# EAGLE board LEDCubeArray (EAGLE 7.2.0)
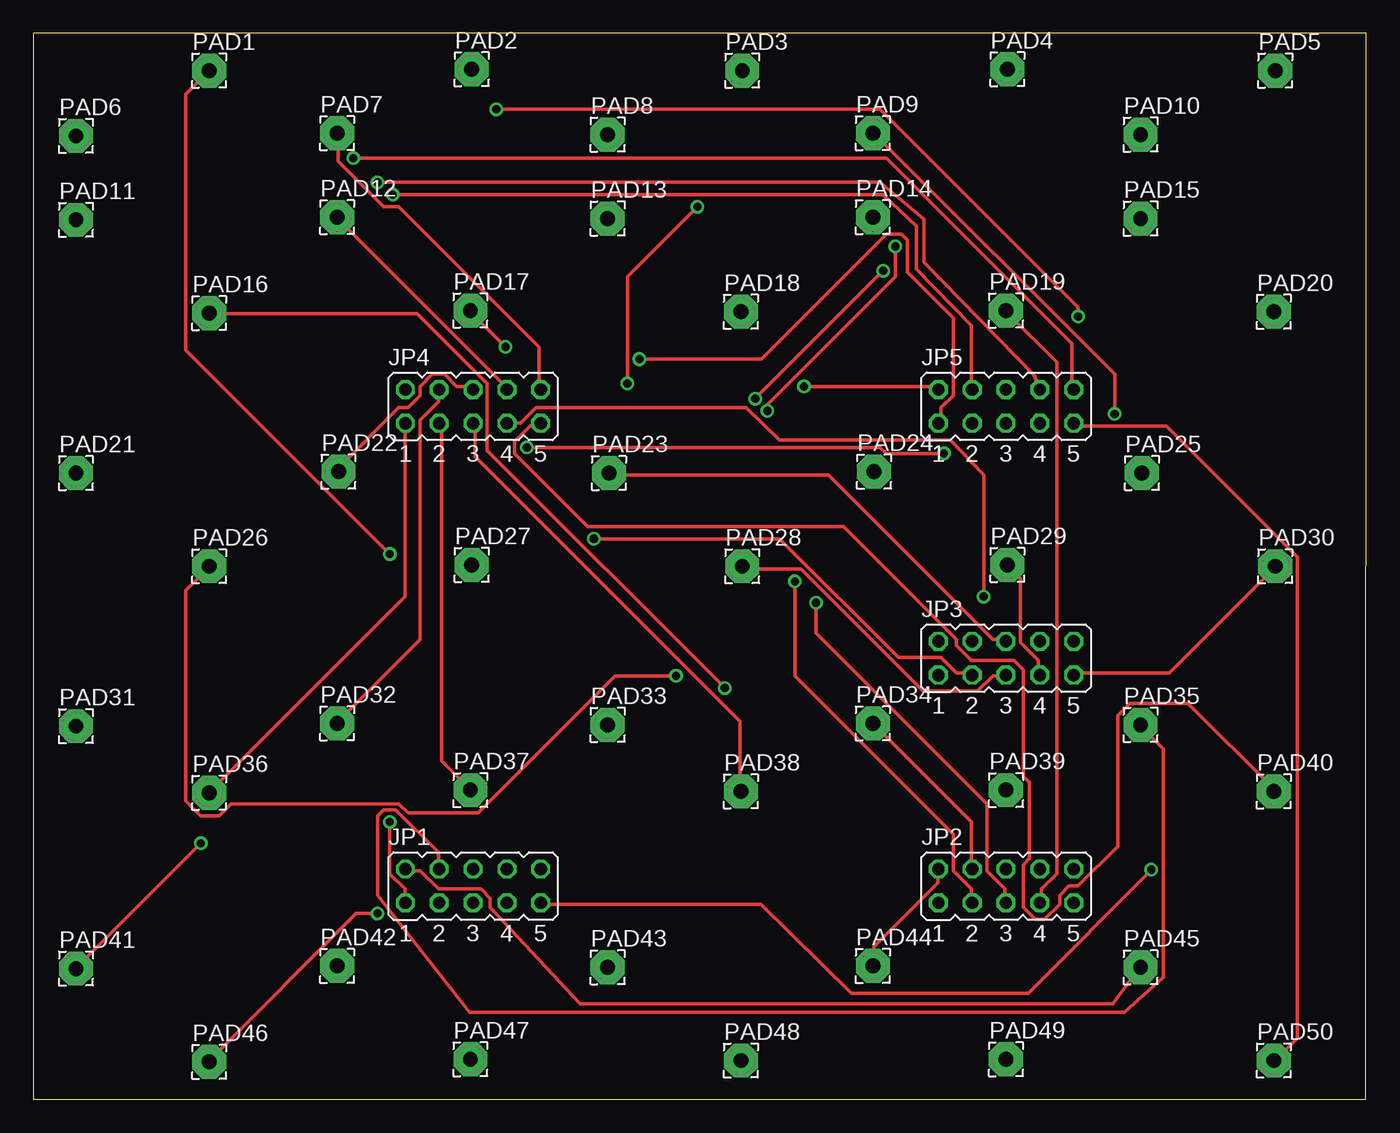
[diagram p0: board, top side]
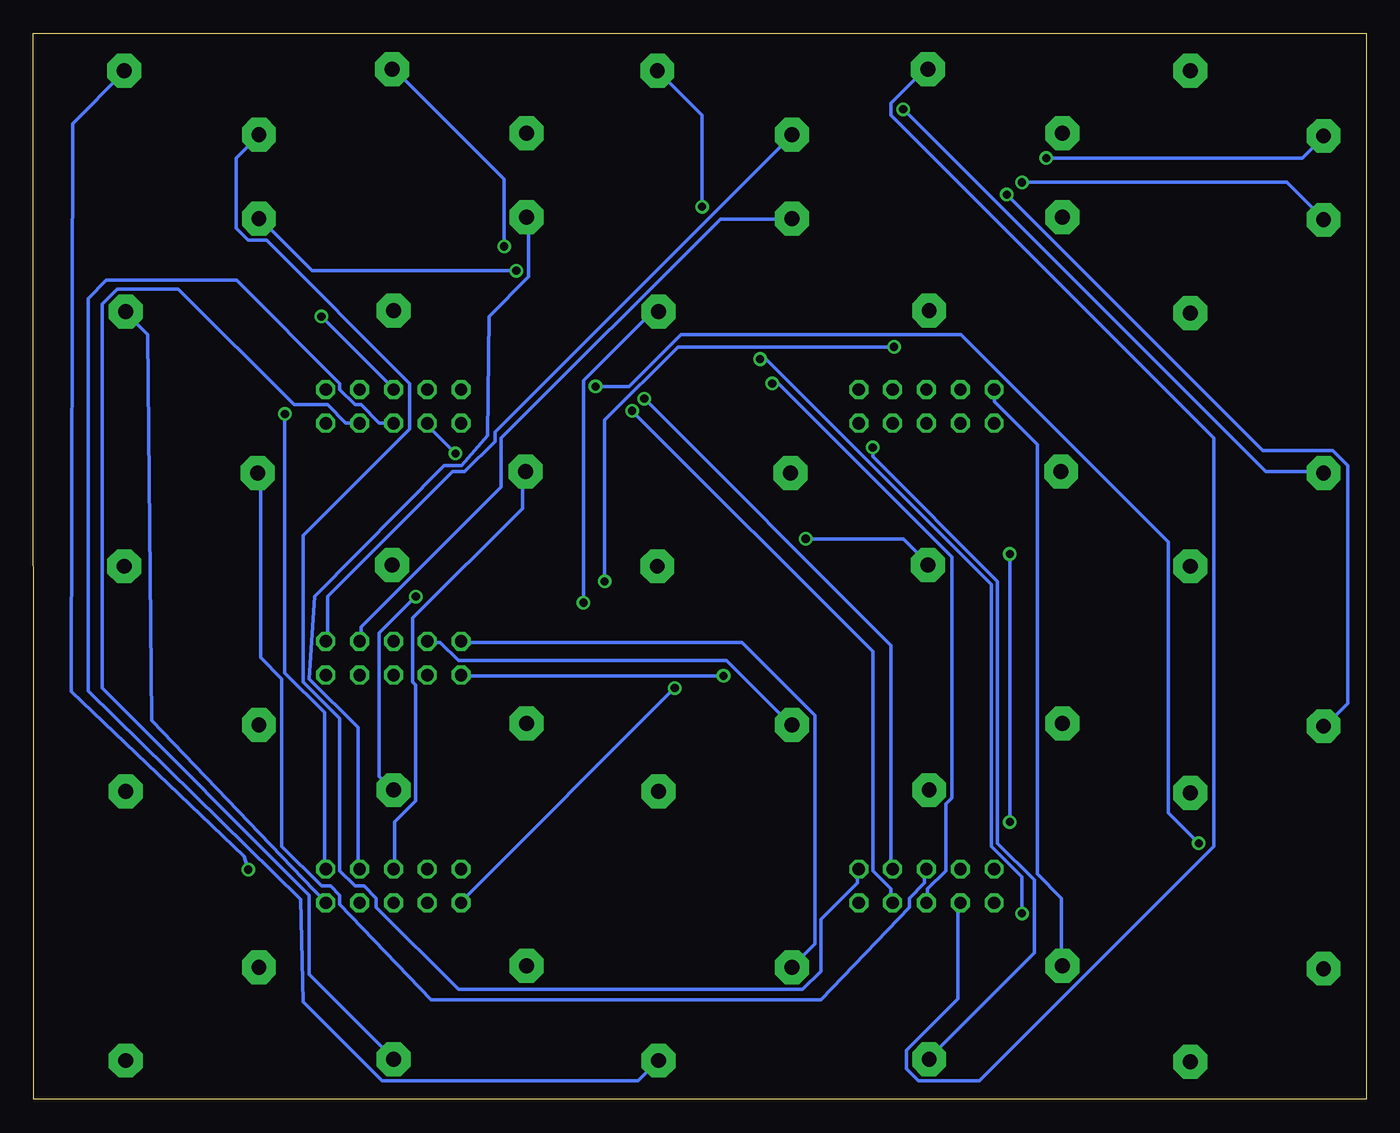
[diagram p1: board, bottom side, seen from below]

Size 100.03 x 80 mm. Coordinates in mm from the lower left corner, seen from the top.
Outline: 0,0 100,0 100.03,80 0,80 0,0
Copper layers (1*16): Top 0.035mm / dielectric 1.5mm / Bottom 0.035mm
Design rules "default": minimum track width 10mil, minimum drill 24mil, track to track 8mil, track to pad 8mil, pad to pad 8mil, via to via 8mil, smd to smd 8mil, copper to edge 40mil, drill to drill 8mil, minimum pad ring 10mil, minimum via ring 8mil, stop-mask expansion 4mil, vias tented up to drill 0mil, thermal gap 10mil

## Footprints (pad centres in the part's own frame; a part is rotated, then mirrored left to right if it is on the bottom)
JP5Q = drill 0.914 octagon: 1 -5.08,-1.27; 2 -5.08,1.27; 3 -2.54,-1.27; 4 -2.54,1.27; 5 0,-1.27; 6 0,1.27; 7 2.54,-1.27; 8 2.54,1.27; 9 5.08,-1.27; 10 5.08,1.27
2,54/1,1 = drill 1.118 pad 2.54 octagon: 1 0,0

## Placement (x,y rotation side)
JP1  [JP5Q]  33,16 0 top
JP2  [JP5Q]  73,16 0 top
JP3  [JP5Q]  73,33.1 0 top
JP4  [JP5Q]  33,52 0 top
JP5  [JP5Q]  73,52 0 top
PAD1  [2,54/1,1]  13.2,77.2 0 top
PAD2  [2,54/1,1]  32.9,77.3 0 top
PAD3  [2,54/1,1]  53.2,77.2 0 top
PAD4  [2,54/1,1]  73.1,77.3 0 top
PAD5  [2,54/1,1]  93.2,77.2 0 top
PAD6  [2,54/1,1]  3.2,72.3 0 top
PAD7  [2,54/1,1]  22.8,72.5 0 top
PAD8  [2,54/1,1]  43.1,72.4 0 top
PAD9  [2,54/1,1]  63,72.5 0 top
PAD10  [2,54/1,1]  83.1,72.4 0 top
PAD11  [2,54/1,1]  3.2,66 0 top
PAD12  [2,54/1,1]  22.8,66.2 0 top
PAD13  [2,54/1,1]  43.1,66.1 0 top
PAD14  [2,54/1,1]  63,66.2 0 top
PAD15  [2,54/1,1]  83.1,66.1 0 top
PAD16  [2,54/1,1]  13.2,59 0 top
PAD17  [2,54/1,1]  32.8,59.2 0 top
PAD18  [2,54/1,1]  53.1,59.1 0 top
PAD19  [2,54/1,1]  73,59.2 0 top
PAD20  [2,54/1,1]  93.1,59.1 0 top
PAD21  [2,54/1,1]  3.2,47 0 top
PAD22  [2,54/1,1]  22.9,47.1 0 top
PAD23  [2,54/1,1]  43.2,47 0 top
PAD24  [2,54/1,1]  63.1,47.1 0 top
PAD25  [2,54/1,1]  83.2,47 0 top
PAD26  [2,54/1,1]  13.2,40 0 top
PAD27  [2,54/1,1]  32.9,40.1 0 top
PAD28  [2,54/1,1]  53.2,40 0 top
PAD29  [2,54/1,1]  73.1,40.1 0 top
PAD30  [2,54/1,1]  93.2,40 0 top
PAD31  [2,54/1,1]  3.2,28 0 top
PAD32  [2,54/1,1]  22.8,28.2 0 top
PAD33  [2,54/1,1]  43.1,28.1 0 top
PAD34  [2,54/1,1]  63,28.2 0 top
PAD35  [2,54/1,1]  83.1,28.1 0 top
PAD36  [2,54/1,1]  13.2,23 0 top
PAD37  [2,54/1,1]  32.8,23.2 0 top
PAD38  [2,54/1,1]  53.1,23.1 0 top
PAD39  [2,54/1,1]  73,23.2 0 top
PAD40  [2,54/1,1]  93.1,23.1 0 top
PAD41  [2,54/1,1]  3.2,9.8 0 top
PAD42  [2,54/1,1]  22.8,10 0 top
PAD43  [2,54/1,1]  43.1,9.9 0 top
PAD44  [2,54/1,1]  63,10 0 top
PAD45  [2,54/1,1]  83.1,9.9 0 top
PAD46  [2,54/1,1]  13.2,2.8 0 top
PAD47  [2,54/1,1]  32.8,3 0 top
PAD48  [2,54/1,1]  53.1,2.9 0 top
PAD49  [2,54/1,1]  73,3 0 top
PAD50  [2,54/1,1]  93.1,2.9 0 top

## Library data of the parts
JP1-JP5 = jumper
PAD1-PAD50 = wirepad

## Nets
1A1: JP1.1 PAD1.1
1A2: JP1.3 PAD2.1
1A3: JP1.5 PAD3.1
1A4: JP1.7 PAD4.1
1A5: JP1.9 PAD5.1
1C1: JP1.2 PAD45.1
1C2: JP1.4 PAD35.1
1C3: JP1.6 PAD25.1
1C4: JP1.8 PAD15.1
1C5: JP1.10 PAD10.1
2A1: JP2.1 PAD16.1
2A2: JP2.3 PAD17.1
2A3: JP2.5 PAD18.1
2A4: JP2.7 PAD19.1
2A5: JP2.9 PAD20.1
2C1: JP2.2 PAD44.1
2C2: JP2.4 PAD34.1
2C3: JP2.6 PAD24.1
2C4: JP2.8 PAD14.1
2C5: JP2.10 PAD9.1
3A1: JP3.1 PAD26.1
3A2: JP3.3 PAD27.1
3A3: JP3.5 PAD28.1
3A4: JP3.7 PAD29.1
3A5: JP3.9 PAD30.1
3C1: JP3.2 PAD43.1
3C2: JP3.4 PAD33.1
3C3: JP3.6 PAD23.1
3C4: JP3.8 PAD13.1
3C5: JP3.10 PAD8.1
4A1: JP4.1 PAD36.1
4A2: JP4.3 PAD37.1
4A3: JP4.5 PAD38.1
4A4: JP4.7 PAD39.1
4A5: JP4.9 PAD40.1
4C1: JP4.2 PAD42.1
4C2: JP4.4 PAD32.1
4C3: JP4.6 PAD22.1
4C4: JP4.8 PAD12.1
4C5: JP4.10 PAD7.1
5A1: JP5.1 PAD46.1
5A2: JP5.3 PAD47.1
5A3: JP5.5 PAD48.1
5A4: JP5.7 PAD49.1
5A5: JP5.9 PAD50.1
5C1: JP5.2 PAD41.1
5C2: JP5.4 PAD31.1
5C3: JP5.6 PAD21.1
5C4: JP5.8 PAD11.1
5C5: JP5.10 PAD6.1

## Tracks (layer width: path | path; a pad name or v marks a point on that pad's centre or on a via)
1A1  (via drill 0.61)
  Top 0.254: v26.75,20.8 26.75,16.92 27.89,15.77 27.89,14.86 JP1.1 | v26.75,40.92 11.43,56.24 11.43,75.44 13.03,77.04 PAD1.1
  Bottom 0.254: v26.75,40.92 v26.75,20.8
1A2
  Bottom 0.254: JP1.3 30.63,14.63 30.63,7.54 34.52,3.66 34.52,2.29 33.6,1.37 29.03,1.37 11.43,18.97 11.43,49.61 35.66,73.84 35.66,74.75 32.92,77.5 PAD2.1
1A3  (via drill 0.61)
  Top 0.254: v44.58,53.72 44.58,61.72 v49.84,66.98
  Bottom 0.254: v44.58,53.72 44.12,53.72 31.09,40.69 31.09,22.63 31.55,22.17 31.55,17.14 32.92,15.77 32.92,14.86 JP1.5 | v49.84,66.98 49.84,73.84 53.03,77.04 PAD3.1
1A4  (via drill 0.61)
  Top 0.254: v55.09,51.66 55.09,52.12 64.69,61.72 v64.69,64.01
  Bottom 0.254: v55.09,51.66 37.03,33.6 37.03,17.14 35.66,15.77 35.66,14.86 JP1.7 | v64.69,64.01 64.69,69.04 72.92,77.27 PAD4.1
1A5  (via drill 0.61)
  Top 0.254: v83.9,17.23 74.69,7.93 61.41,7.93 54.61,14.63 38.18,14.63 JP1.9
  Bottom 0.254: v83.9,17.23 84.2,18.22 97.18,30.6 97.08,73.22 93.27,77.04 PAD5.1
1C1
  Top 0.254: JP1.2 28.12,17.14 29.03,17.14 30.4,15.77 33.6,15.77 34.29,15.09 34.29,14.4 41.02,7.17 81.02,7.17 82.98,9.83 PAD45.1
1C2
  Top 0.254: JP1.4 30.4,17.37 30.4,18.52 27.2,21.72 26.29,21.72 25.83,21.26 25.83,15.32 32.73,6.51 81.88,6.51 84.81,9.14 84.81,26.29 83.21,27.89 PAD35.1
1C3
  Bottom 0.254: JP1.6 33.15,17.14 33.15,16.23 34.29,15.09 34.29,14.4 40.92,7.47 70.18,7.47 77.04,14.63 77.04,15.32 77.72,16 78.41,16 81.38,18.97 81.38,31.55 82.98,33.15 82.98,46.86 PAD25.1
1C4  (via drill 0.61)
  Top 0.254: v63.78,62.18 v54.18,52.58
  Bottom 0.254: v54.18,52.58 35.66,34.06 35.66,17.37 JP1.8 | v63.78,62.18 79.1,62.18 82.98,66.06 PAD15.1
1C5
  Bottom 0.254: JP1.10 38.18,17.14 38.18,16.23 40.92,13.49 40.92,9.6 42.29,8.23 68.12,8.23 74.3,14.4 74.3,15.09 75.21,16 75.89,16 77.04,17.14 77.04,28.57 79.78,31.32 79.78,42.29 71.78,50.29 71.78,53.72 82.53,64.47 83.9,64.47 84.81,65.38 84.81,70.64 83.21,72.24 PAD10.1
2A1  (via drill 0.61)
  Top 0.254: v51.89,30.86 34.06,48.69 34.06,53.72 28.8,58.98 13.26,58.98 PAD16.1
  Bottom 0.254: v51.89,30.86 67.89,14.86 JP2.1
2A2  (via drill 0.61)
  Top 0.254: v57.15,38.86 57.15,31.77 69.04,19.89 69.04,17.14 70.41,15.77 70.41,14.86 JP2.3 | v35.43,56.46 32.92,58.98 PAD17.1
  Bottom 0.254: v57.15,38.86 57.15,50.98 51.66,56.46 v35.43,56.46
2A3  (via drill 0.61)
  Top 0.254: v58.75,37.26 58.75,34.98 71.55,22.17 71.55,17.14 72.92,15.77 72.92,14.86 JP2.5
  Bottom 0.254: v58.75,37.26 58.75,53.95 53.72,58.98 53.26,58.98 PAD18.1
2A4
  Top 0.254: JP2.7 75.67,14.86 75.67,15.77 76.81,16.92 76.81,55.32 73.15,58.98 PAD19.1
2A5
  Bottom 0.254: JP2.9 78.18,14.86 91.14,28.42 91.44,57.38 93.04,58.98 PAD20.1
2C1
  Top 0.254: JP2.2 67.89,17.14 67.89,16.23 63.09,11.43 63.09,10.06 PAD44.1
2C2
  Top 0.254: JP2.4 70.41,17.37 70.41,20.8 63.09,28.12 PAD34.1
2C3
  Bottom 0.254: JP2.6 72.92,17.37 72.92,20.8 71.32,22.4 71.32,31.09 71.55,31.32 71.55,36.12 63.32,44.35 63.32,47.09 PAD24.1
2C4
  Bottom 0.254: JP2.8 75.67,17.37 75.67,27.89 79.32,31.55 78.92,37.73 69.21,47.55 67.89,47.55 65.94,49.81 65.84,58.75 62.87,61.72 62.87,66.06 PAD14.1
2C5  (via drill 0.61)
  Top 0.254: v81.15,51.44 81.15,54.41 63.09,72.47 PAD9.1
  Bottom 0.254: v81.15,51.44 81.15,32 78.18,29.03 78.18,17.37 JP2.10
3A1  (via drill 0.61)
  Top 0.254: v48.23,31.77 43.66,31.77 33.38,21.49 28.12,21.49 27.43,22.17 14.86,22.17 13.95,21.26 12.57,21.26 11.43,22.4 11.43,38.18 13.03,39.78 PAD26.1
  Bottom 0.254: v48.23,31.77 67.89,31.77 JP3.1
3A2  (via drill 0.61)
  Top 0.254: v42.06,42.06 56.01,42.06 64.92,33.15 68.12,33.15 69.27,32 70.41,32 JP3.3
  Bottom 0.254: v42.06,42.06 34.75,42.06 32.92,40.23 PAD27.1
3A3
  Top 0.254: JP3.5 72.92,31.77 72.01,31.77 70.87,30.63 66.75,30.63 57.61,39.78 53.26,39.78 PAD28.1
3A4
  Top 0.254: JP3.7 75.44,32 75.44,32.92 74.07,34.29 74.07,39.09 73.15,40.01 PAD29.1
3A5
  Top 0.254: JP3.9 78.18,32 85.27,32 93.04,39.78 PAD30.1
3C1
  Bottom 0.254: JP3.2 67.89,34.29 46.86,34.29 41.38,28.8 41.38,11.66 42.98,10.06 PAD43.1
3C2
  Bottom 0.254: JP3.4 70.41,34.29 69.49,34.29 68.12,32.92 48.01,32.92 43.2,28.12 PAD33.1
3C3
  Top 0.254: JP3.6 72.92,34.52 72.01,34.52 59.66,46.86 43.2,46.86 PAD23.1
3C4
  Bottom 0.254: JP3.8 75.44,34.52 75.44,35.43 64.92,45.95 64.92,49.61 48.46,66.06 43.2,66.06 PAD13.1
3C5
  Bottom 0.254: JP3.10 77.95,34.52 77.95,37.72 68.58,47.09 67.67,47.09 65.38,49.38 65.38,50.06 43.2,72.24 PAD8.1
4A1
  Top 0.254: JP4.1 27.89,50.52 27.89,37.72 13.26,23.09 PAD36.1
4A2
  Top 0.254: JP4.3 30.63,50.52 30.63,25.38 32.69,23.32 PAD37.1
4A3
  Top 0.254: JP4.5 33.15,50.52 33.15,48.23 53.03,28.35 53.03,23.32 PAD38.1
4A4  (via drill 0.61)
  Top 0.254: v71.32,37.72 71.32,46.86 68.81,49.48 56.01,49.48 53.49,51.89 37.72,51.89 36.58,50.75 35.66,50.75 JP4.7
  Bottom 0.254: v71.32,37.72 74.07,34.98 74.07,24.23 73.15,23.32 PAD39.1
4A5
  Top 0.254: JP4.9 37.95,50.52 37.26,50.52 36.12,49.38 36.12,48.46 41.6,42.98 60.81,42.98 69.27,34.52 69.27,34.06 70.41,32.92 73.61,32.92 74.3,32.23 74.3,24.23 74.75,23.77 74.75,18.06 74.3,17.6 74.3,14.4 75.21,13.49 75.89,13.49 77.04,14.63 77.04,15.32 77.72,16 78.41,16 81.38,18.97 81.38,28.8 82.3,29.72 86.64,29.72 93.04,23.32 PAD40.1
4C1
  Bottom 0.254: JP4.2 27.89,53.26 27.89,52.35 24.69,49.15 24.69,16.92 22.86,15.09 22.86,10.06 PAD42.1
4C2
  Top 0.254: JP4.4 30.4,53.26 30.4,52.35 29.03,50.98 29.03,34.52 22.86,28.35 PAD32.1
4C3
  Top 0.254: JP4.6 32.92,53.49 31.77,53.49 30.86,54.41 29.95,54.41 29.03,53.49 29.03,52.81 28.12,51.89 27.43,51.89 22.86,47.32 PAD22.1
4C4
  Top 0.254: JP4.8 35.43,53.49 22.86,66.06 PAD12.1
4C5
  Top 0.254: JP4.10 37.95,53.49 37.95,56.46 27.43,66.98 26.29,66.98 22.86,70.41 22.86,72.47 PAD7.1
5A1  (via drill 0.61)
  Top 0.254: v45.49,55.55 54.63,55.55 64.01,64.92 65.15,64.92 65.61,64.47 65.61,62.06 69.04,58.64 69.04,52.81 68.12,51.89 68.12,50.75 JP5.1 | v25.83,13.95 24.23,13.95 13.26,2.97 PAD46.1
  Bottom 0.254: v45.49,55.55 45.03,55.55 28.12,38.63 28.12,18.97 25.83,16.69 v25.83,13.95
5A2  (via drill 0.61)
  Top 0.254: v68.35,48.46 64.01,48.46 63.55,48.92 v37.03,48.92
  Bottom 0.254: v68.35,48.46 70.41,50.52 JP5.3 | v37.03,48.92 37.03,48.23 27.66,38.86 27.66,19.2 24.92,16.46 24.92,10.97 32.69,3.2 PAD47.1
5A3
  Bottom 0.254: JP5.5 73.15,50.75 74.07,50.75 75.44,52.12 75.89,52.12 77.04,53.26 77.04,53.72 84.78,61.47 94.56,61.47 95.93,60.09 95.93,30.63 79.98,14.99 79.78,7.32 73.84,1.37 54.63,1.37 53.26,2.74 PAD48.1
5A4
  Bottom 0.254: JP5.7 75.67,50.75 76.58,50.75 77.95,52.12 80.47,52.12 89.15,60.81 93.73,60.81 94.87,59.66 94.87,30.86 79.32,15.32 79.32,9.37 73.15,3.2 PAD49.1
5A5
  Top 0.254: JP5.9 78.18,50.52 85.04,50.52 94.87,40.69 94.87,4.57 93.27,2.97 PAD50.1
5C1  (via drill 0.61)
  Top 0.254: v57.84,53.49 67.89,53.49 JP5.2 | v12.57,19.2 3.2,9.83 PAD41.1
  Bottom 0.254: v57.84,53.49 55.32,53.49 51.44,57.38 30.4,57.38 14.86,41.83 14.86,21.49 v12.57,19.2
5C2  (via drill 0.61)
  Top 0.254: v26.98,67.89 63.78,67.89 66.27,65.51 66.27,62.29 70.41,58.05 70.41,53.49 JP5.4
  Bottom 0.254: v26.98,67.89 7.77,48.69 2.52,48.69 1.37,47.55 1.37,29.72 2.97,28.12 PAD31.1
5C3  (via drill 0.61)
  Top 0.254: v78.41,58.75 78.41,59.44 63.55,74.3 v34.75,74.3
  Bottom 0.254: v78.41,58.75 73.15,53.49 JP5.6 | v34.75,74.3 7.54,47.09 3.2,47.09 PAD21.1
5C4  (via drill 0.61)
  Top 0.254: v25.83,68.81 63.55,68.81 66.82,66.04 66.82,62.82 75.14,54.31 75.44,53.49 JP5.8
  Bottom 0.254: v25.83,68.81 5.94,68.81 3.2,66.06 PAD11.1
5C5  (via drill 0.61)
  Top 0.254: v24,70.64 64.01,70.64 77.95,56.69 77.95,53.49 JP5.10
  Bottom 0.254: v24,70.64 4.8,70.64 3.2,72.24 PAD6.1